# Altium PCB BearlyML Carrier Board.pcbdoc (part 1 of 2)
Units mil, origin at the board's own origin, x right, y up, seen from the top; angles counter-clockwise.
Board outline 9503.92 x 5409.44 mil, 6 copper layers (Top Layer, Mid-Layer 1, Mid-Layer 2, Mid-Layer 3, Mid-Layer 4, Bottom Layer); 88 components, 113 nets, 672 pads, 238 vias.
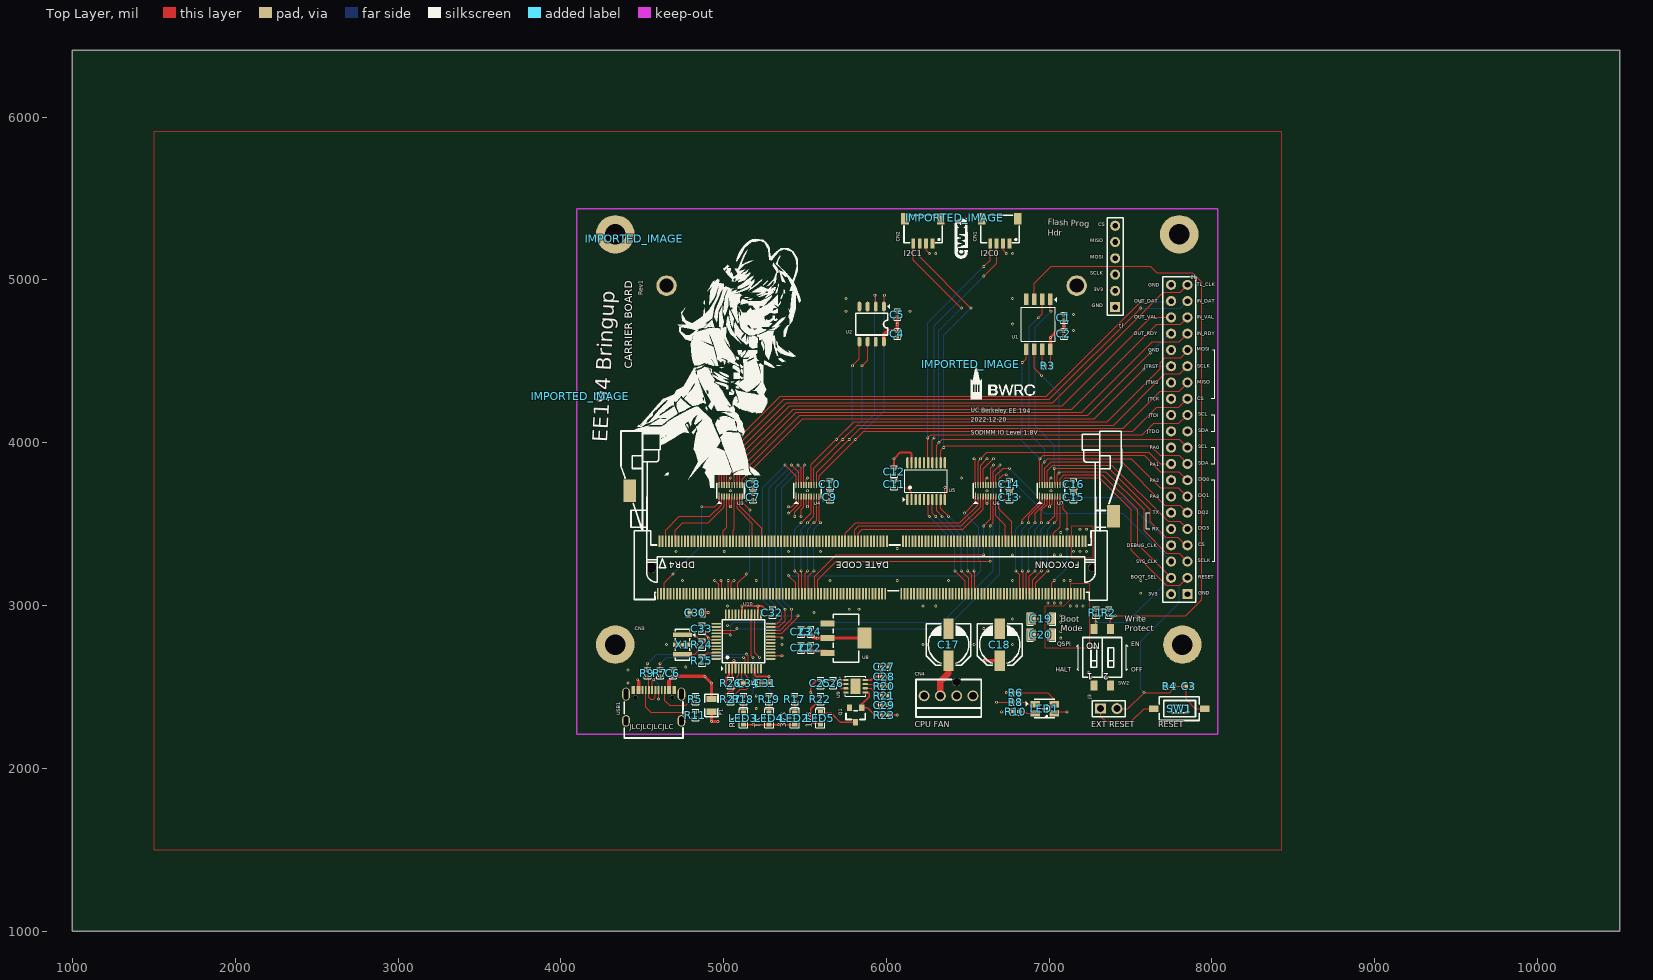
[diagram p0: Top Layer view]
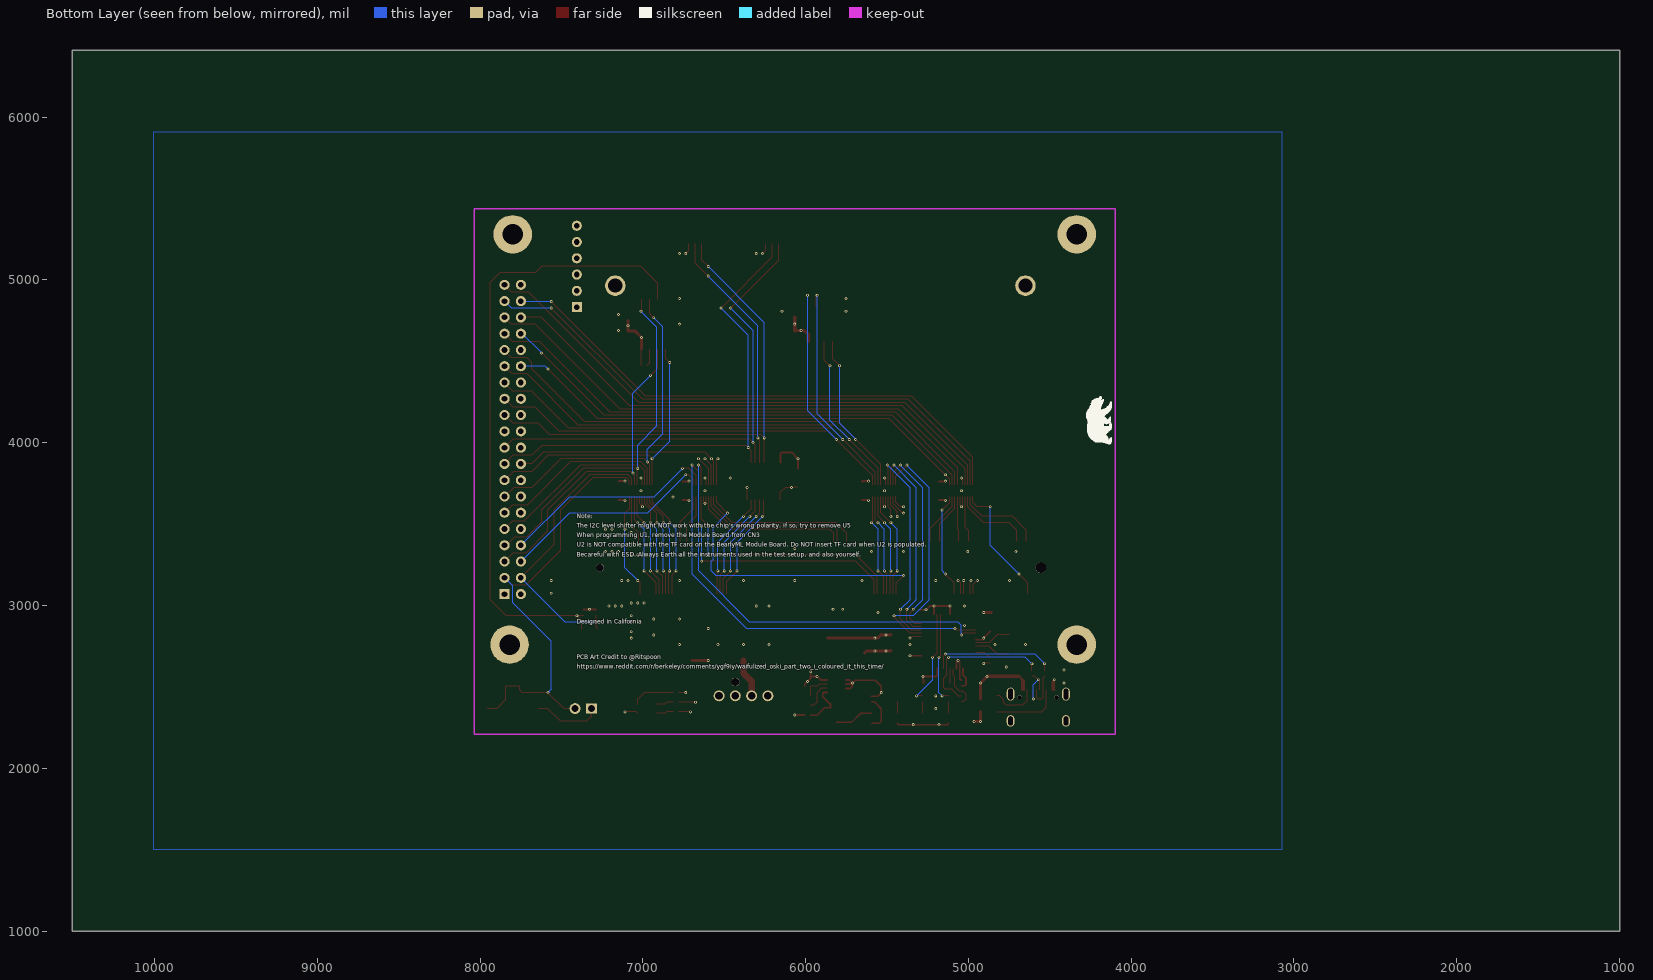
[diagram p1: Bottom Layer view, seen from below]
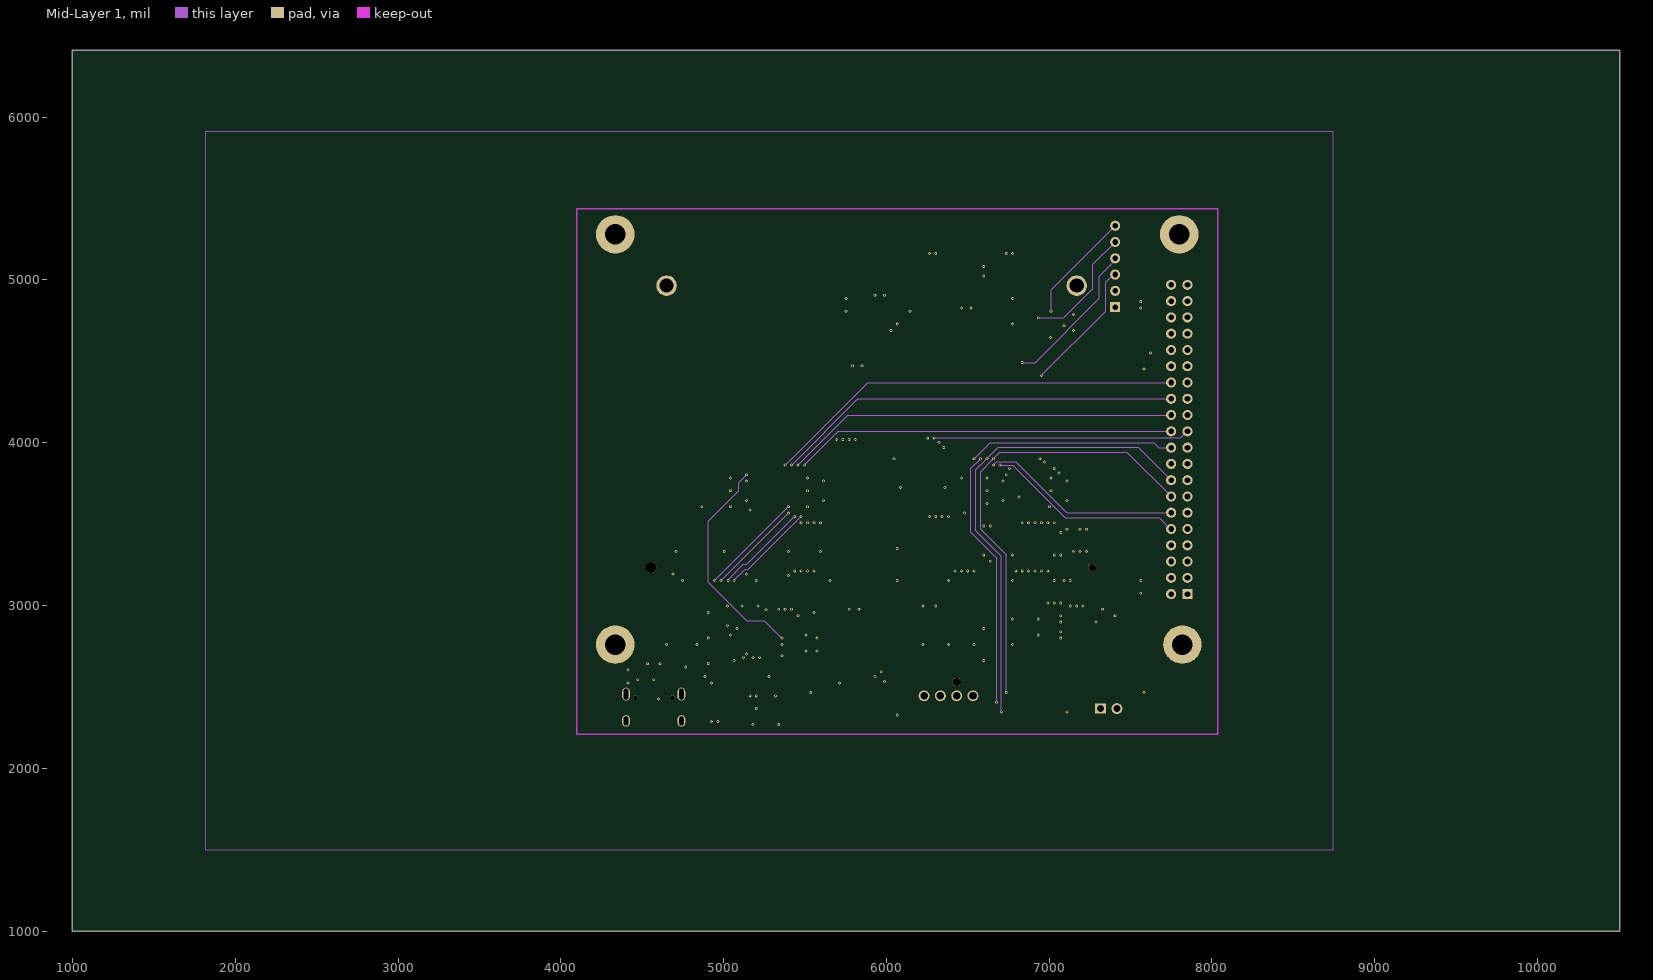
[diagram p2: Mid-Layer 1]
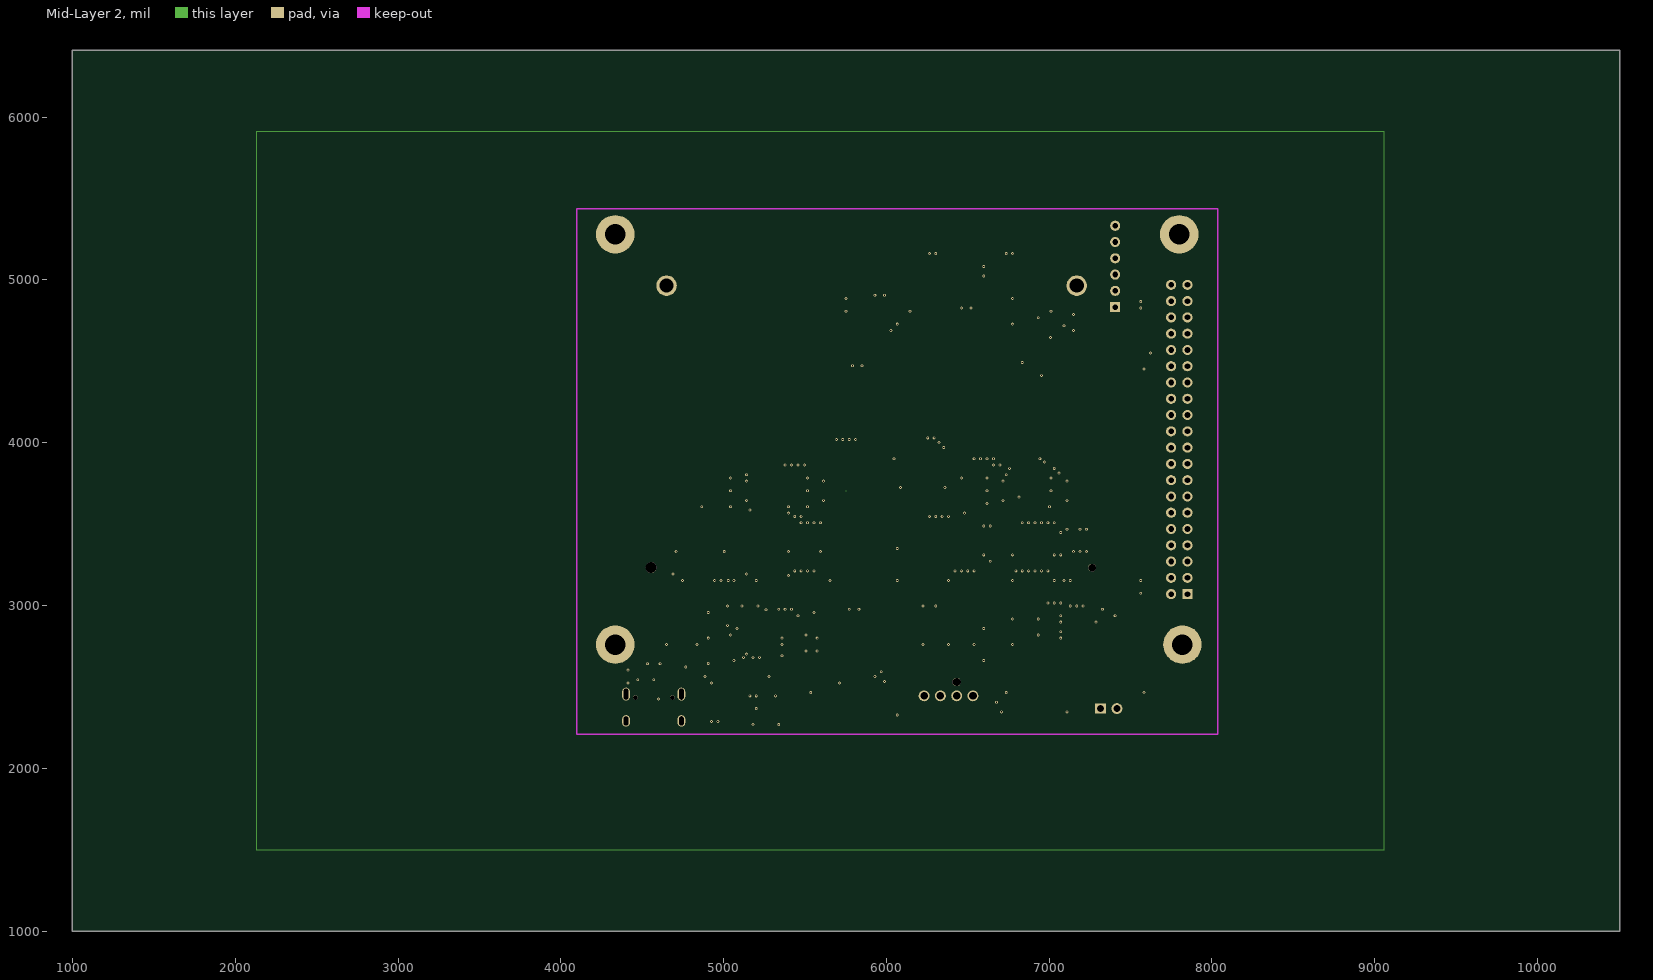
[diagram p3: Mid-Layer 2]
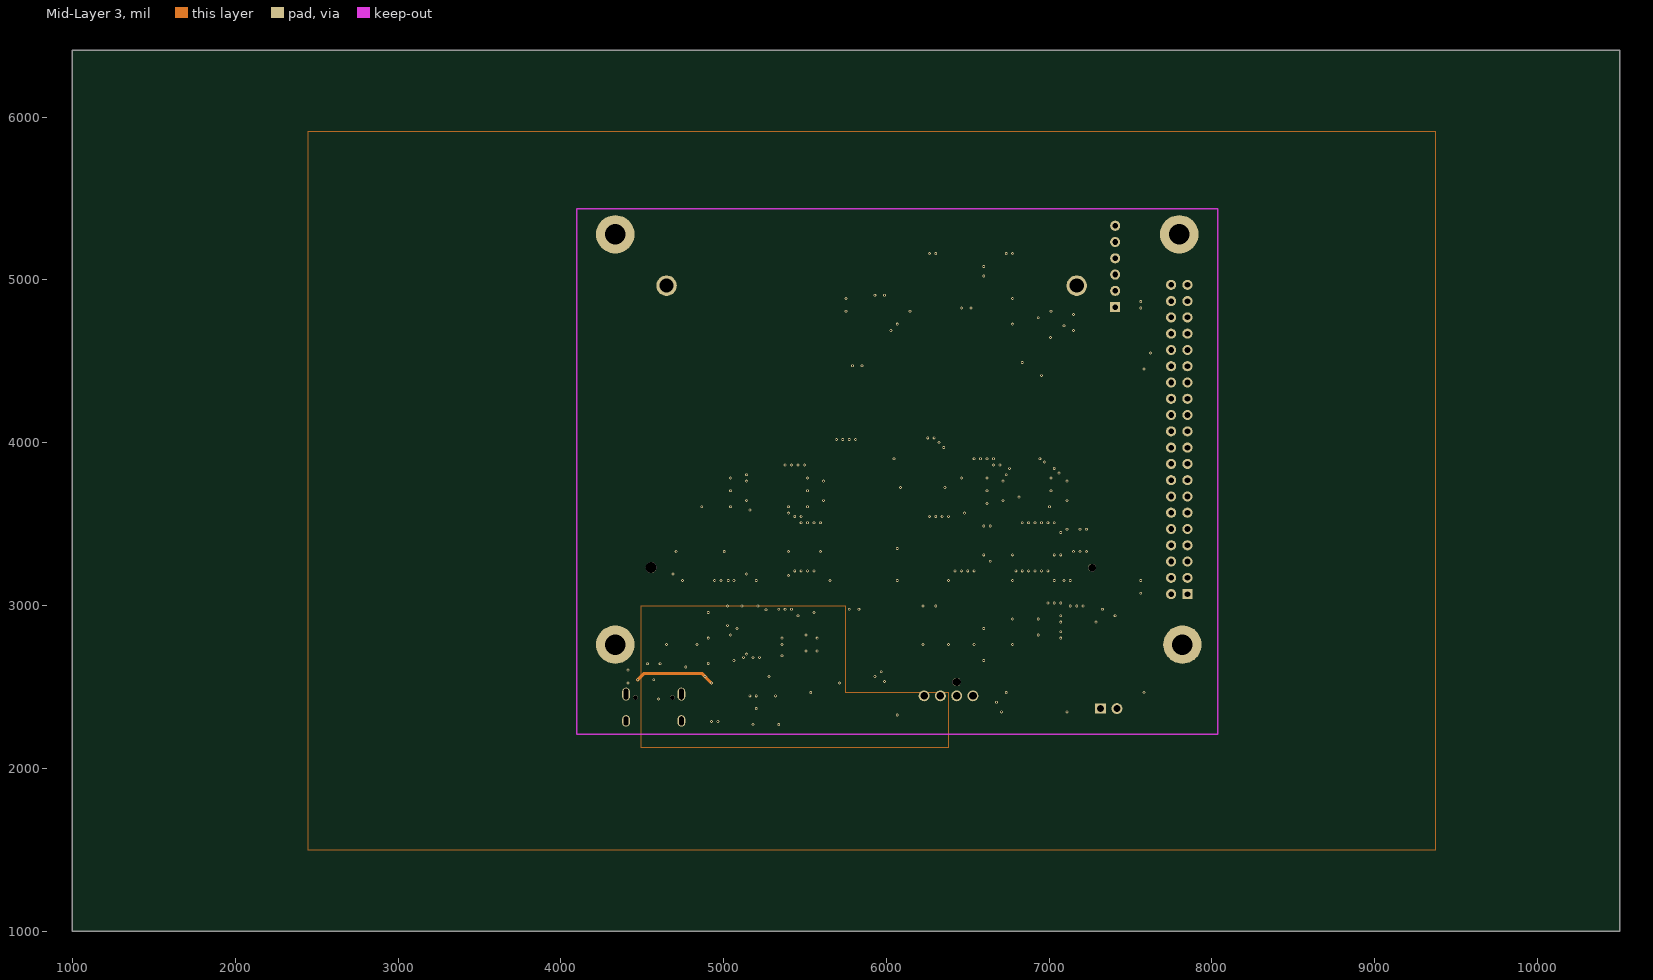
[diagram p4: Mid-Layer 3]
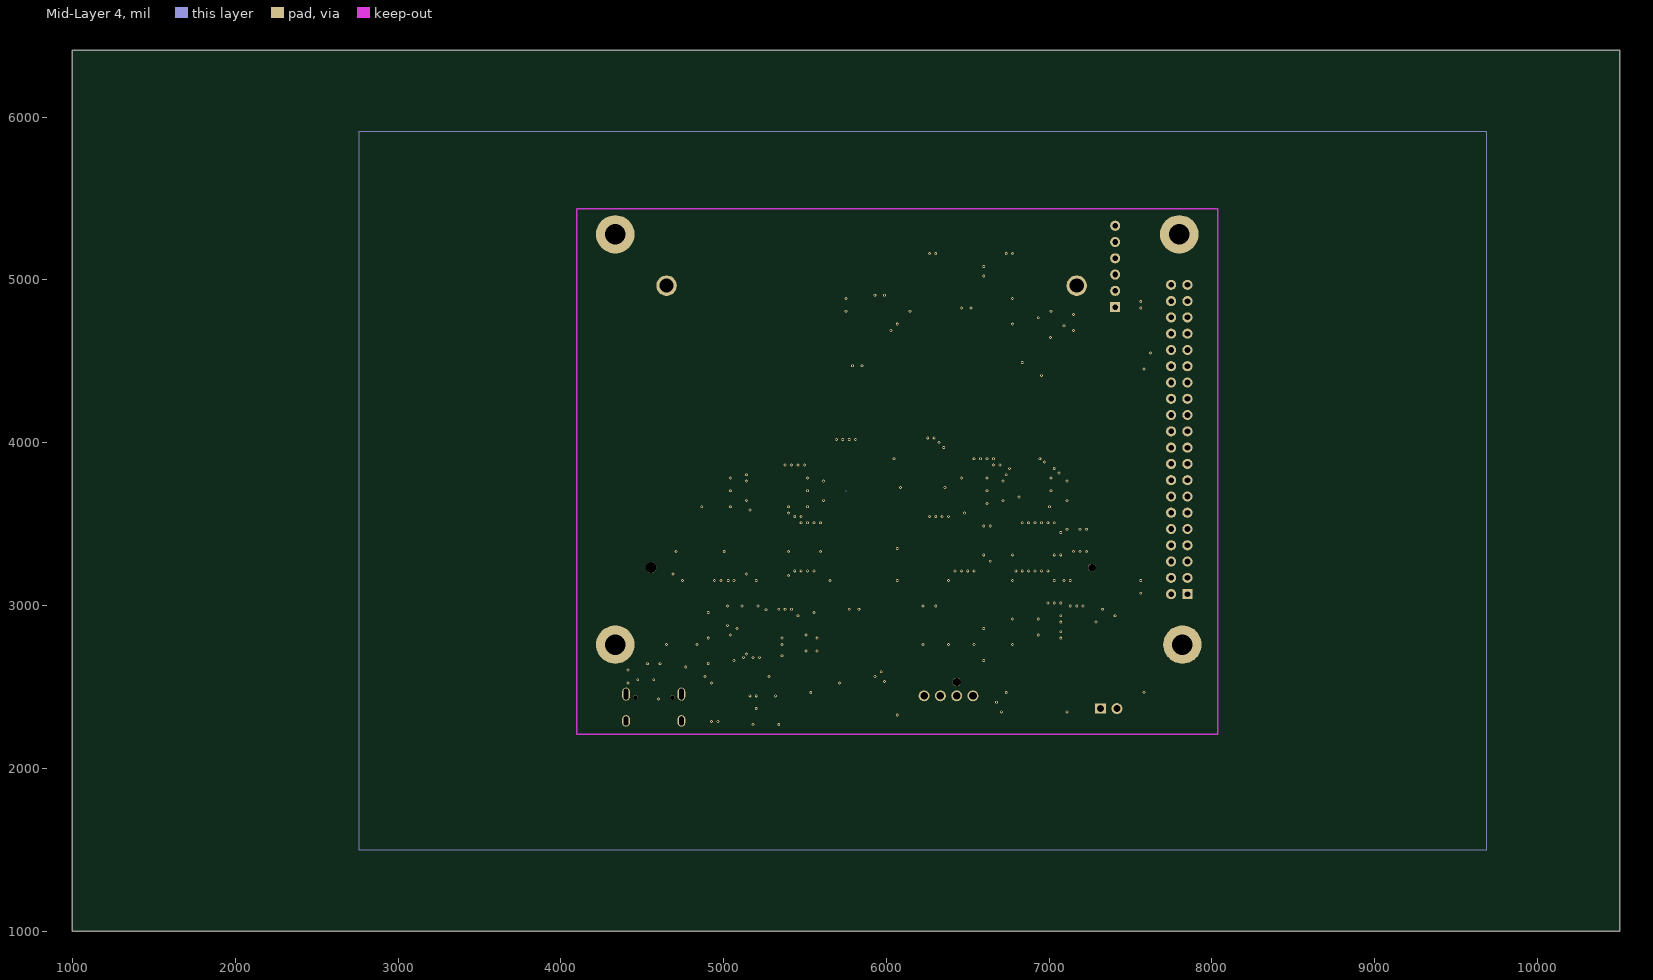
[diagram p5: Mid-Layer 4]

## Layer stack, top to bottom
Top Solder: solder mask 0.4, Solder Resist, Dk 3.5
Top Layer: signal copper 1.4
Dielectric1: dielectric 12.6, FR-4, Dk 4.8
Mid-Layer 1: signal copper 1.4
Dielectric3: dielectric 12.6, FR-4, Dk 4.8
Mid-Layer 2: signal copper 1.4
Dielectric5: dielectric 12.6, FR-4, Dk 4.8
Mid-Layer 3: signal copper 1.4
Dielectric2: dielectric 12.6, FR-4, Dk 4.8
Mid-Layer 4: signal copper 1.4
Dielectric4: dielectric 12.6, FR-4, Dk 4.8
Bottom Layer: signal copper 1.4
Bottom Solder: solder mask 0.4, Solder Resist, Dk 3.5

## Board outline
10503.92,1000 1000,1000 1000,6409.44 10503.92,6409.44

## Design rules (kind name [scope] priority, off if disabled: settings)
Clearance [All] p1: gap=10 ignorepadtopadclearanceinfootprint=FALSE except(0: Arc-Hole Track-Hole SMDPad-Hole THPad-Hole Via-Hole Fill-Hole Poly-Hole Region-Hole Text-Hole)
PolygonConnect [All] p1: connectstyle=Relief reliefconductorwidth=10 reliefentries=4 polygonreliefangle="90 Angle" airgapwidth=10
RoutingVias [All] p1: holewidth=28 width=50 viastyle="Through Hole" minholewidth=28 minwidth=50 maxholewidth=28 maxwidth=50
SolderMaskExpansion [All] p1: expansion=4 istentingtop=FALSE
Width [All] p1: maxlimit=10 minlimit=10 preferedwidth=10
30 further rules are at their usual default settings.

## Components (designator, comment, footprint, x,y, rotation, side; value= is the part's Value field where it differs from the comment)
C1 "100n" CAPA-0402 7090.46,4767.74 r270 top
C2 "1u" CAPA-0402 7090.46,4669.34 r90 top
C3 "100n" CAPA-0402 7858.24,2503.94 r180 top
C4 "100n" CAPA-0402 6066.94,4669.31 r90 top
C5 "1u" CAPA-0402 6066.94,4787.4 r270 top
C6 "10n" CAPA-0402 4688.94,2582.64 r270 top
C7 "100n" CAPA-0402 5181.14,3665.34 r270 top
C8 "100n" CAPA-0402 5181.14,3744.04 r90 top
C9 "100n" CAPA-0402 5653.54,3665.34 r270 top
C10 "100n" CAPA-0402 5653.54,3744.04 r90 top
C11 "100n" CAPA-0402 6047.24,3744.04 r270 top
C12 "100n" CAPA-0402 6047.24,3822.84 r90 top
C13 "100n" CAPA-0402 6755.94,3665.34 r270 top
C14 "100n" CAPA-0402 6755.94,3744.04 r90 top
C15 "100n" CAPA-0402 7149.64,3665.34 r270 top
C16 "100n" CAPA-0402 7149.64,3744.04 r90 top
C17 "220u" CAPPR5.0-D6.3_L6.6_W6.6 6381.84,2759.84 r270 top
C18 "220u" CAPPR5.0-D6.3_L6.6_W6.6 6696.84,2759.84 r270 top
C19 "22u" CAPA-1206 6952.74,2917.34 r0 top
C20 "22u" CAPA-1206 6952.74,2818.94 r0 top
C21 "100n" CAPA-0402 5476.34,2740.14 r270 top
C22 "10u" CAPA-0402 5535.44,2740.14 r270 top
C23 "10u" CAPA-0402 5476.34,2838.54 r270 top
C24 "100n" CAPA-0402 5535.44,2838.54 r270 top
C25 "10u" CAPA-0402 5594.44,2523.64 r90 top
C26 "100n" CAPA-0402 5673.24,2523.64 r90 top
C27 "100n" CAPA-0402 5988.14,2622.04 r180 top
C28 "10u" CAPA-0402 5988.14,2562.94 r180 top
C29 "1n" CAPA-0402 5988.14,2385.84 r180 top
C30 "10u" CAPA-0603 4826.74,2956.64 r0 top
C31 "100n" CAPA-0402 5259.84,2523.64 r0 top
C32 "100n" CAPA-0402 5299.24,2956.64 r90 top
C33 "100n" CAPA-0402 4866.14,2858.24 r270 top
C34 "33n" CAPA-0603 5151.54,2523.64 r180 top
CN1 "SM04B-SRSS-TB(LF)(SN)" CONN-SMD_4P-P1.00_SM04B-SRSS-TB-LF-SN 6696.83,5299.24 r180 top
CN2 "SM04B-SRSS-TB(LF)(SN)" CONN-SMD_4P-P1.00_SM04B-SRSS-TB-LF-SN 6224.43,5299.24 r180 top
CN3 "ASAA826-E8SB0-7H" CONN-SMD_ASAA826-E8SB0-7H 5909.44,3232.28 r180 top
CN4 "47053-1000" CONN-TH_47053-1000 6381.84,2444.84 r180 top
F1 "6V 2A" R0805 4925.19,2385.82 r270 top
IMPORTED_IMAGE "Comment" IMPORTED_IMAGE 4118.76,4284.69 r0 top
IMPORTED_IMAGE "Comment" IMPORTED_IMAGE 6519.68,4482.27 r0 top
IMPORTED_IMAGE "Comment" IMPORTED_IMAGE 4451.3,5254.03 r0 top
IMPORTED_IMAGE "Comment" IMPORTED_IMAGE 6420,5382.45 r0 top
J1 "HDR-M-2.54_1x6" HDR-M-2.54_1X6 7405.54,5082.64 r90 top
J2 "HDR-M-2.54_2x20" HDR-M-2.54_2X20 7799.24,4019.64 r90 top
J3 "HDR-M-2.54_1x2" HDR-M-2.54_1X2 7366.14,2366.14 r0 top
LED1 "LED-RGB" LED-ARRAY-SMD_4P-L3.2-W2.7-TL-RD_TJ-S3528 6972.44,2366.14 r0 top
LED2 "LED-0603_R" LED-0603 5437.04,2307.04 r90 top
LED3 "LED-0603_W" LED-0603 5122.04,2307.04 r90 top
LED4 "LED-0603_W" LED-0603 5279.54,2307.04 r90 top
LED5 "LED-0603_R" LED-0603 5594.48,2307.09 r90 top
Q1 "FDV301N" SOT-23_L2.9-W1.3-P1.90-LS2.4-BR 5811.02,2326.77 r90 top
R1 "2k" RES-0402 7287.39,2956.69 r90 top
R2 "10k" RES-0402 7366.14,2956.64 r90 top
R3 "10k" RES-0402 6992.06,4472.44 r0 top
R4 "2k" RES-0402 7740.15,2503.93 r0 top
R5 "5k1" RES-0402 4826.74,2425.24 r270 top
R6 "1k" RES-0402 6795.24,2464.54 r180 top
R7 "27R" RES-0402 4610.23,2582.68 r90 top
R8 "1k" RES-0402 6795.24,2405.54 r180 top
R9 "27R" RES-0402 4531.54,2582.64 r90 top
R10 "1k" RES-0402 6795.24,2346.44 r180 top
R11 "5k1" RES-0402 4826.74,2326.74 r270 top
R17 "1k" RES-0402 5437.04,2425.24 r270 top
R18 "1k" RES-0402 5122.04,2425.24 r270 top
R19 "1k" RES-0402 5279.54,2425.24 r270 top
R20 "160k" RES-0402 5988.14,2503.94 r0 top
R21 "47k" RES-0402 5988.14,2444.84 r180 top
R22 "1k" RES-0402 5594.44,2425.24 r90 top
R23 "10k" RES-0402 5988.14,2326.74 r0 top
R24 "1M" RES-0402 4866.14,2759.84 r270 top
R25 "470R" RES-0402 4866.14,2661.44 r90 top
R26 "10k" RES-0402 5043.34,2523.64 r270 top
R27 "1k5" RES-0402 5043.34,2425.24 r270 top
SW1 "TS-1007S-AR02516" SW-SMD_L6.1-W3.6-LS7.9 7799.2,2366.14 r180 top
SW2 "KF1027B-02P-L00-ON-01B" SW-SMD_4P-L6.1-W6.2-P2.54-LS10.0 7326.76,2681.1 r0 top
U1 "IS25LP032D-JBLA3" SOIC-8_L5.3-W5.3-P1.27-LS7.9-BL 6933.06,4728.34 r180 top
U2 "APS6404L-3SQR-SN" SOIC-8_L5.0-W4.0-P1.27-LS6.0-TL 5909.44,4728.35 r270 top
U3 "TXB0108DQSR" SON-20_L4.0-W2.0-P0.40-BL 5043.31,3704.68 r0 top
U4 "TXB0108DQSR" SON-20_L4.0-W2.0-P0.40-BL 5515.7,3704.68 r0 top
U5 "TXS0108EPWR" TSSOP-20_L6.5-W4.4-P0.65-LS6.4-BL 6244.04,3763.74 r0 top
U6 "TXB0108DQSR" SON-20_L4.0-W2.0-P0.40-BL 6618.1,3704.68 r0 top
U7 "TXB0108DQSR" SON-20_L4.0-W2.0-P0.40-BL 7011.81,3704.68 r0 top
U8 "AMS1117-3.3" SOT-223_L6.5_W3.5_P2.30_BL 5751.94,2799.24 r270 top
U9 "MCP1726-ADJE/MF" TDFN-8_L3.0-W3.0-P0.65-BL-EP 5810.94,2503.96 r270 top
U10 "FT2232D" LQFP-48_L7.0-W7.0-P0.50-LS9.0-BL 5122.04,2779.54 r0 top
USB1 "USB-TYPEC" USB-C-SMD_KH-TYPE-C-16P 4570.86,2385.82 r0 top
X1 "6MHz" CRYSTAL-SMD_3P-L4.5-W2.0-L 4748.05,2759.84 r270 top

## Footprints (in the part's own frame and the unit in brackets; to place one, negate y for a bottom-side part, rotate by r counter-clockwise, add the part's x,y. Pads: shape width x height; smd on the part's side, far side on the other; paste and mask are expansions set on the pad)
CAPA-0402 [mm]
  rect 0.566x0.54 smd paste-100 mask+0.051: 1(-0.433,0) 2(0.433,0)
  silkscreen extent -0.87,-0.5 0.87,0.5
CAPA-0603 [mm]
  rect 0.9x0.8 smd paste+0 mask+0.051: 1(-0.8,0) 2(0.8,0)
  silkscreen extent -1.5,-0.62 1.5,0.62
CAPA-1206 [mil]
  rect 47.54x66.97 smd paste-3937.01 mask+2: 1(-58.22,0) 2(58.22,0)
  silkscreen extent -89,-39 89,39
CAPPR5.0-D6.3_L6.6_W6.6 [mm]
  rect 3.2x1.6 smd paste+0 mask+0.102: 1(2.5,0) 2(-2.5,0)
  silkscreen extent -3.25,-3.5 3.25,3.5
CONN-SMD_4P-P1.00_SM04B-SRSS-TB-LF-SN [mm]
  rect 0.6x1.55 smd paste+0 mask+0.051: 1(-1.5,1.938) 2(-0.5,1.938) 3(0.501,1.938) 4(1.5,1.938)
  rect 1.2x1.8 smd paste+0 mask+0.051: 5(2.8,-1.938) 6(-2.8,-1.938)
  silkscreen extent -3.02,-2.46 2.96,1.8
CONN-SMD_ASAA826-E8SB0-7H [mm]
  rect 0.3x1.8 smd paste+0 mask+0.051: 1(33.375,4.1) 2(33.125,-4.1) 3(32.875,4.1) 4(32.625,-4.1) 5(32.375,4.1) 6(32.125,-4.1) 7(31.875,4.1) 8(31.625,-4.1) 9(31.375,4.1) 10(31.125,-4.1) 11(30.875,4.1) 12(30.625,-4.1) 13(30.375,4.1) 14(30.125,-4.1) 15(29.875,4.1) 16(29.625,-4.1) 17(29.375,4.1) 18(29.125,-4.1) 19(28.875,4.1) 20(28.625,-4.1) 21(28.375,4.1) 22(28.125,-4.1) 23(27.875,4.1) 24(27.625,-4.1) 25(27.375,4.1) 26(27.125,-4.1) 27(26.875,4.1) 28(26.625,-4.1) 29(26.375,4.1) 30(26.125,-4.1) 31(25.875,4.1) 32(25.625,-4.1) 33(25.375,4.1) 34(25.125,-4.1) 35(24.875,4.1) 36(24.625,-4.1) 37(24.375,4.1) 38(24.125,-4.1) 39(23.875,4.1) 40(23.625,-4.1) 41(23.375,4.1) 42(23.125,-4.1) 43(22.875,4.1) 44(22.625,-4.1) 45(22.375,4.1) 46(22.125,-4.1) 47(21.875,4.1) 48(21.625,-4.1) 49(21.375,4.1) 50(21.125,-4.1) 51(20.875,4.1) 52(20.625,-4.1) 53(20.375,4.1) 54(20.125,-4.1) 55(19.875,4.1) 56(19.625,-4.1) 57(19.375,4.1) 58(19.125,-4.1) 59(18.875,4.1) 60(18.625,-4.1) 61(18.375,4.1) 62(18.125,-4.1) 63(17.875,4.1) 64(17.625,-4.1) 65(17.375,4.1) 66(17.125,-4.1) 67(16.875,4.1) 68(16.625,-4.1) 69(16.375,4.1) 70(16.125,-4.1) 71(15.875,4.1) 72(15.625,-4.1) 73(15.375,4.1) 74(15.125,-4.1) 75(14.875,4.1) 76(14.625,-4.1) 77(14.375,4.1) 78(14.125,-4.1) 79(13.875,4.1) 80(13.625,-4.1) 81(13.375,4.1) 82(13.125,-4.1) 83(12.875,4.1) 84(12.625,-4.1) 85(12.375,4.1) 86(12.125,-4.1) 87(11.875,4.1) 88(11.625,-4.1) 89(11.375,4.1) 90(11.125,-4.1) 91(10.875,4.1) 92(10.625,-4.1) 93(10.375,4.1) 94(10.125,-4.1) 95(9.875,4.1) 96(9.625,-4.1) 97(9.375,4.1) 98(9.125,-4.1) 99(8.875,4.1) 100(8.625,-4.1) 101(8.375,4.1) 102(8.125,-4.1) 103(7.875,4.1) 104(7.625,-4.1) 105(7.375,4.1) 106(7.125,-4.1) 107(6.875,4.1) 108(6.625,-4.1) 109(6.375,4.1) 110(6.125,-4.1) 111(5.875,4.1) 112(5.625,-4.1) 113(5.375,4.1) 114(5.125,-4.1) 115(4.875,4.1) 116(4.625,-4.1) 117(4.375,4.1) 118(4.125,-4.1) 119(3.875,4.1) 120(3.625,-4.1) 121(3.375,4.1) 122(3.125,-4.1) 123(2.875,4.1) 124(2.625,-4.1) 125(2.375,4.1) 126(2.125,-4.1) 127(1.875,4.1) 128(1.625,-4.1) 129(1.375,4.1) 130(1.125,-4.1) 131(0.875,4.1) 132(0.625,-4.1) 133(0.375,4.1) 134(0.125,-4.1) 135(-0.125,4.1) 136(-0.375,-4.1) 137(-0.625,4.1) 138(-0.875,-4.1) 139(-1.125,4.1) 140(-1.375,-4.1) 141(-1.625,4.1) 142(-1.875,-4.1) 143(-2.125,4.1) 144(-2.375,-4.1) 145(-4.625,4.1) 146(-4.875,-4.1) 147(-5.125,4.1) 148(-5.375,-4.1) 149(-5.625,4.1) 150(-5.875,-4.1) 151(-6.125,4.1) 152(-6.375,-4.1) 153(-6.625,4.1) 154(-6.875,-4.1) 155(-7.125,4.1) 156(-7.375,-4.1) 157(-7.625,4.1) 158(-7.875,-4.1) 159(-8.125,4.1) 160(-8.375,-4.1) 161(-8.625,4.1) 162(-8.875,-4.1) 163(-9.125,4.1) 164(-9.375,-4.1) 165(-9.625,4.1) 166(-9.875,-4.1) 167(-10.125,4.1) 168(-10.375,-4.1) 169(-10.625,4.1) 170(-10.875,-4.1) 171(-11.125,4.1) 172(-11.375,-4.1) 173(-11.625,4.1) 174(-11.875,-4.1) 175(-12.125,4.1) 176(-12.375,-4.1) 177(-12.625,4.1) 178(-12.875,-4.1) 179(-13.125,4.1) 180(-13.375,-4.1) 181(-13.625,4.1) 182(-13.875,-4.1) 183(-14.125,4.1) 184(-14.375,-4.1) 185(-14.625,4.1) 186(-14.875,-4.1) 187(-15.125,4.1) 188(-15.375,-4.1) 189(-15.625,4.1) 190(-15.875,-4.1) 191(-16.125,4.1) 192(-16.375,-4.1) 193(-16.625,4.1) 194(-16.875,-4.1) 195(-17.125,4.1) 196(-17.375,-4.1) 197(-17.625,4.1) 198(-17.875,-4.1) 199(-18.125,4.1) 200(-18.375,-4.1) 201(-18.625,4.1) 202(-18.875,-4.1) 203(-19.125,4.1) 204(-19.375,-4.1) 205(-19.625,4.1) 206(-19.875,-4.1) 207(-20.125,4.1) 208(-20.375,-4.1) 209(-20.625,4.1) 210(-20.875,-4.1) 211(-21.125,4.1) 212(-21.375,-4.1) 213(-21.625,4.1) 214(-21.875,-4.1) 215(-22.125,4.1) 216(-22.375,-4.1) 217(-22.625,4.1) 218(-22.875,-4.1) 219(-23.125,4.1) 220(-23.375,-4.1) 221(-23.625,4.1) 222(-23.875,-4.1) 223(-24.125,4.1) 224(-24.375,-4.1) 225(-24.625,4.1) 226(-24.875,-4.1) 227(-25.125,4.1) 228(-25.375,-4.1) 229(-25.625,4.1) 230(-25.875,-4.1) 231(-26.125,4.1) 232(-26.375,-4.1) 233(-26.625,4.1) 234(-26.875,-4.1) 235(-27.125,4.1) 236(-27.375,-4.1) 237(-27.625,4.1) 238(-27.875,-4.1) 239(-28.125,4.1) 240(-28.375,-4.1) 241(-28.625,4.1) 242(-28.875,-4.1) 243(-29.125,4.1) 244(-29.375,-4.1) 245(-29.625,4.1) 246(-29.875,-4.1) 247(-30.125,4.1) 248(-30.375,-4.1) 249(-30.625,4.1) 250(-30.875,-4.1) 251(-31.125,4.1) 252(-31.375,-4.1) 253(-31.625,4.1) 254(-31.875,-4.1) 255(-32.125,4.1) 256(-32.375,-4.1) 257(-32.625,4.1) 258(-32.875,-4.1) 259(-33.125,4.1) 260(-33.375,-4.1)
  rect 2x3.5 smd paste+0 mask+0.051: 261(37.75,-12) 262(-37.75,-8)
  round 1.2 hole 1.2 unplated paste+0: ""(-34.4,0)
  round 1.7 hole 1.7 unplated paste+0: ""(34.4,0)
  silkscreen extent -38.98,-21.33 39.11,5.1
CONN-TH_47053-1000 [mm]
  round 1.7 hole 1.2 paste+0 mask+0.051: 1(3.81,0) 2(1.27,0) 3(-1.27,0) 4(-3.81,0)
  round 1.3 hole 1.3 unplated paste+0: ""(-1.27,-2.16)
  silkscreen extent -5.08,-2.54 5.08,3.3
CRYSTAL-SMD_3P-L4.5-W2.0-L [mm]
  rect 0.7x3 smd paste+0 mask+0.05: 1(-1.5,0) 2(0,0) 3(1.5,0)
  silkscreen extent -2.41,-1.14 2.41,2
HDR-M-2.54_1X2 [mm]
  rect 1.7x1.575 hole 1.1 paste+0 mask+0.051: 1(-1.27,0)
  round 1.7 hole 1.1 paste+0 mask+0.051: 2(1.27,0)
  silkscreen extent -2.54,-1.27 2.54,1.27
HDR-M-2.54_1X6 [mil]
  rect 62x62 hole 35 paste+0 mask+2: 1(-250,0)
  round 62 hole 35 paste+0 mask+2: 2(-150,0) 3(-50,0) 4(50,0) 5(150,0) 6(250,0)
  silkscreen extent -300,-50 300,50
HDR-M-2.54_2X20 [mil]
  rect 62x62 hole 35 paste+0 mask+2: 1(-950,-50)
  round 62 hole 35 paste+0 mask+2: 2(-950,50) 3(-850,-50) 4(-850,50) 5(-750,-50) 6(-750,50) 7(-650,-50) 8(-650,50) 9(-550,-50) 10(-550,50) 11(-450,-50) 12(-450,50) 13(-350,-50) 14(-350,50) 15(-250,-50) 16(-250,50) 17(-150,-50) 18(-150,50) 19(-50,-50) 20(-50,50) 21(50,-50) 22(50,50) 23(150,-50) 24(150,50) 25(250,-50) 26(250,50) 27(350,-50) 28(350,50) 29(450,-50) 30(450,50) 31(550,-50) 32(550,50) 33(650,-50) 34(650,50) 35(750,-50) 36(750,50) 37(850,-50) 38(850,50) 39(950,-50) 40(950,50)
  silkscreen extent -1000,-100 1000,100
IMPORTED_IMAGE [mil]
LED-0603 [mm]
  rect 0.9x0.8 smd paste+0 mask+0.102: 1(-0.8,0) 2(0.8,0)
  silkscreen extent -1.51,-0.69 1.7,0.69
LED-ARRAY-SMD_4P-L3.2-W2.7-TL-RD_TJ-S3528 [mm]
  rect 1.5x1 smd paste+0 mask+0.051: 1(-1.5,0.7) 2(-1.5,-0.7) 3(1.5,0.7) 4(1.5,-0.7)
  silkscreen extent -2.94,-1.44 1.61,1.44
LQFP-48_L7.0-W7.0-P0.50-LS9.0-BL [mm]
  oval 0.27x1.5 smd paste+0 mask+0.05: 1(-2.75,-4.25) 2(-2.25,-4.25) 3(-1.75,-4.25) 4(-1.25,-4.25) 5(-0.75,-4.25) 6(-0.25,-4.25) 7(0.25,-4.25) 8(0.75,-4.25) 9(1.25,-4.25) 10(1.75,-4.25) 11(2.25,-4.25) 12(2.75,-4.25) 25(2.75,4.25) 26(2.25,4.25) 27(1.75,4.25) 28(1.25,4.25) 29(0.75,4.25) 30(0.25,4.25) 31(-0.25,4.25) 32(-0.75,4.25) 33(-1.25,4.25) 34(-1.75,4.25) 35(-2.25,4.25) 36(-2.75,4.25)
  oval 1.5x0.27 smd paste+0 mask+0.05: 13(4.25,-2.75) 14(4.25,-2.25) 15(4.25,-1.75) 16(4.25,-1.25) 17(4.25,-0.75) 18(4.25,-0.25) 19(4.25,0.25) 20(4.25,0.75) 21(4.25,1.25) 22(4.25,1.75) 23(4.25,2.25) 24(4.25,2.75) 37(-4.25,2.75) 38(-4.25,2.25) 39(-4.25,1.75) 40(-4.25,1.25) 41(-4.25,0.75) 42(-4.25,0.25) 43(-4.25,-0.25) 44(-4.25,-0.75) 45(-4.25,-1.25) 46(-4.25,-1.75) 47(-4.25,-2.25) 48(-4.25,-2.75)
  silkscreen extent -3.5,-4.62 3.3,3.34
R0805 [mm]
  rect 1x1.55 smd paste+0 mask+0.102: 1(-1,0) 2(1,0)
  silkscreen extent -1.75,-1.02 1.75,1.02
RES-0402 [mm]
  rect 0.566x0.54 smd paste-100 mask+0.051: 1(-0.433,0) 2(0.433,0)
  silkscreen extent -0.87,-0.5 0.87,0.5
SOIC-8_L5.0-W4.0-P1.27-LS6.0-TL [mm]
  oval 1.52x0.6 smd paste+0 mask+0.051: 1(-2.74,1.905) 2(-2.74,0.635) 3(-2.74,-0.635) 4(-2.74,-1.905) 5(2.74,-1.905) 6(2.74,-0.635) 7(2.74,0.635) 8(2.74,1.905)
  silkscreen extent -3.12,-2.5 1.7,2.81
SOIC-8_L5.3-W5.3-P1.27-LS7.9-BL [mm]
  rect 0.7x1.8 smd paste+0 mask+0.05: 1(-1.905,-3.9) 2(-0.635,-3.9) 3(0.635,-3.9) 4(1.905,-3.9) 5(1.905,3.9) 6(0.635,3.9) 7(-0.635,3.9) 8(-1.905,3.9)
  silkscreen extent -2.85,-4.18 2.65,2.65
SON-20_L4.0-W2.0-P0.40-BL [mm]
  rect 0.2x1.1 smd paste+0 mask+0.051: 1(-1.8,-0.85)
  rect 0.2x1 smd paste+0 mask+0.051: 2(-1.4,-0.9) 3(-1,-0.9) 4(-0.6,-0.9) 5(-0.2,-0.9) 6(0.2,-0.9) 7(0.6,-0.9) 8(1,-0.9) 9(1.4,-0.9) 10(1.8,-0.9) 11(1.8,0.9) 12(1.4,0.9) 13(1,0.9) 14(0.6,0.9) 15(0.2,0.9) 16(-0.2,0.9) 17(-0.6,0.9) 18(-1,0.9) 19(-1.4,0.9) 20(-1.8,0.9)
  silkscreen extent -2.16,-2 2.16,1.14
SOT-23_L2.9-W1.3-P1.90-LS2.4-BR [mm]
  rect 1x0.8 smd paste+0 mask+0.051: 1(1.15,-0.95) 2(1.15,0.95) 3(-1.15,0)
  silkscreen extent -0.7,-1.5 0.7,1.5
SOT-223_L6.5_W3.5_P2.30_BL [mm]
  rect 0.95x2.15 smd paste+0 mask+0.102: 1(-2.3,-2.9) 2(0,-2.9) 3(2.3,-2.9)
  rect 3.25x2.2 smd paste+0 mask+0.102: 2(0,2.9)
  silkscreen extent -3.75,-2 3.75,2
SW-SMD_4P-L6.1-W6.2-P2.54-LS10.0 [mil]
  rect 43.31x60 smd paste+0 mask+2: 1(-50.01,-173.59) 2(49.99,-173.59) 3(49.99,173.58) 4(-50.01,173.58)
  silkscreen extent -120,-123 120,122
SW-SMD_L6.1-W3.6-LS7.9 [mm]
  rect 1.5x1 smd paste+0 mask+0.051: 1(-3.95,0) 2(3.95,0)
  silkscreen extent -3.1,-1.85 3.1,1.85
TDFN-8_L3.0-W3.0-P0.65-BL-EP [mm]
  oval 0.35x0.84 smd paste+0 mask+0.051: 1(-0.975,-1.495) 2(-0.325,-1.495) 3(0.325,-1.495) 4(0.975,-1.495) 5(0.975,1.495) 6(0.325,1.495) 7(-0.325,1.495) 8(-0.975,1.495)
  rect 2.4x1.6 smd paste+0 mask+0.051: 9(0,0)
  silkscreen extent -1.58,-2.5 1.58,1.58
TSSOP-20_L6.5-W4.4-P0.65-LS6.4-BL [mm]
  oval 0.364x1.742 smd paste+0 mask+0.051: 1(-2.925,-2.871) 2(-2.275,-2.871) 3(-1.625,-2.871) 4(-0.975,-2.871) 5(-0.325,-2.871) 6(0.325,-2.871) 7(0.975,-2.871) 8(1.625,-2.871) 9(2.275,-2.871) 10(2.925,-2.871) 11(2.925,2.871) 12(2.275,2.871) 13(1.625,2.871) 14(0.975,2.871) 15(0.325,2.871) 16(-0.325,2.871) 17(-0.975,2.871) 18(-1.625,2.871) 19(-2.275,2.871) 20(-2.925,2.871)
  silkscreen extent -3.63,-3.25 3.33,1.77
USB-C-SMD_KH-TYPE-C-16P [mm]
  oval 1.2x2 hole 0.7 slot 1.7 at 90 deg paste+0 mask+0.051: 1(-4.32,1.765) 2(4.32,1.765)
  oval 1.2x1.8 hole 0.7 slot 1.4 at 90 deg paste+0 mask+0.051: 3(-4.32,-2.415) 4(4.32,-2.415)
  rect 0.3x1.3 smd paste-100 mask+0.05: A1(-3.35,2.415) A4(-2.55,2.415) A5(-1.25,2.415) A6(-0.25,2.415) A7(0.25,2.415) A8(1.25,2.415) A9(2.55,2.415) A12(3.35,2.415) B1(3.05,2.415) B4(2.25,2.415) B5(1.75,2.415) B6(0.75,2.415) B7(-0.75,2.415) B8(-1.75,2.415) B9(-2.25,2.415) B12(-3.05,2.415)
  round 0.7 hole 0.7 unplated paste+0: ""(-2.89,1.235) ""(2.89,1.235)
  silkscreen extent -4.57,-5.08 4.57,0.57

## Free pads (board coordinates)
  round 236.22 hole 125.98 paste+0 mask+2: 1(4334.64,2759.84) 1(4334.64,5279.52) 2(7799.2,5279.52) 2(7818.89,2759.84)
  round 125.98 hole 86.61 paste+0 mask+2: 1(4649.6,4964.56) 1(7169.28,4964.56)

## Via types
v1: diameter 17.72, hole 7.87, Top Layer to Bottom Layer, 238 vias

## Nets (pads, with @x,y where several pads share a name; then routed paths per layer and width w, separated by ;. In a path a pad name is that pad's centre, name@x,y a point inside that pad or via, vN(x,y) a via of type N, cw(c..) or ccw(c..) an arc to the next point about the centre after c; other vN are vias at no path point)
1V8: C7.2 C9.2 C11.2 C13.2 C15.2 C19.2 C20.2 C27.2 C28.2 CN3.251 CN3.253 CN3.255 CN3.257 CN3.259 R20.2 U3.5 U3.6 U4.5 U4.6 U5.2 U5.10 U6.5 U6.6 U7.5 U7.6 U9.8 | length 1137.4
  Top Layer w5.91: U3.5@5035.42,3669.28 5035.42,3614.17 v1(5043.3,3606.29) 5051.18,3614.18 U3.6@5051.18,3669.24 ; U4.5@5507.87,3669.29 5507.87,3614.16 v1(5515.74,3606.29) 5523.58,3614.14 U4.6@5523.58,3669.24 ; C11.2@6047.24,3727 6083.92,3727.05 v1(6086.59,3724.38) ; v1@6086.54,3724.34 6125.94,3724.44 6154.52,3695.86 U5.2@6154.47,3650.71 ; U5.10@6359.2,3650.71 v1(6359.2,3724.4) ; U6.5@6610.23,3669.28 6610.23,3633.85 v1(6618.1,3625.98) 6625.98,3633.86 U6.6@6625.98,3669.24 ; U7.5@7003.93,3669.24 7003.94,3608.27 v1(7001.96,3606.29) 7019.68,3624.01 U7.6@7019.68,3669.24
  Top Layer w11.81: v1(5141.71,3645.64) 5144.38,3648.31 C7.2@5181.14,3648.3 ; v1(5614.15,3645.64) 5616.82,3648.31 C9.2@5653.54,3648.3 ; U9.8@5869.8,2542.35 5908.49,2542.35 v1(5929.13,2562.99) ; v1(5929.13,2562.99) C28.2@5971.14,2562.99 ; C27.2@5971.1,2622.04 5968.5,2619.4 v1(5968.5,2592.52) 5968.5,2565.63 C28.2@5971.14,2562.99 ; R20.2@6005.18,2503.94 6005.22,2516.42 v1(5988.18,2533.46) 5971.14,2550.5 C28.2@5971.14,2562.99 ; v1(6716.52,3645.66) 6719.17,3648.31 C13.2@6755.94,3648.3 ; v1(7110.21,3645.64) 7112.88,3648.31 C15.2@7149.64,3648.3
  other v1: 7070.85,2799.21 7070.85,2838.58 7070.85,2897.63 7070.85,2937 7129.91,2996.06 7169.28,2996.06 7208.65,2996.06
3V3: C1.2 C2.2 C4.2 C5.2 C8.2 C10.2 C12.2 C14.2 C16.2 C18.1 C23.2 C24.2 C25.2 C26.2 C30.2 C31.2 C32.2 CN1.2 CN2.2 CN3.252 CN3.254 CN3.256 CN3.258 CN3.260 J1.2 J2.2 J3.1 LED1.4 LED2.1 LED3.1 LED4.1 R1.2 R2.2 R3.2 R22.2 R23.2 SW1.2 U1.8 U2.8 U3.16 U4.16 U5.19 U6.16 U7.16 U8.2 U9.1 U9.2 U9.3 U10.10 U10.14 U10.26 U10.31 | length 3800.5
  Top Layer w5.91: U3.16@5035.43,3740.15 5035.43,3775.59 v1(5043.3,3783.46) ; U4.16@5507.87,3740.16 5507.87,3775.59 v1(5515.74,3783.46) ; CN2.2@6244.1,5222.94 6244.08,5181.1 v1(6263.77,5161.41) ; U6.16@6610.23,3740.15 6610.23,3775.59 v1(6618.1,3783.46) ; CN1.2@6716.51,5222.94 6716.52,5181.1 v1(6736.21,5161.41) ; U7.16@7003.93,3740.15 7003.93,3775.59 v1(7011.8,3783.46) ; U1.8@7008.02,4574.84 7009.12,4573.74 R3.2@7009.12,4472.47 ; LED1.4@7031.5,2338.58 7039.35,2346.45 v1(7110.22,2346.45) ; J3.1@7316.14,2366.14 7316.14,2317.71 7346.44,2287.4 7503.93,2287.4 7582.66,2366.14 SW1.2@7643.69,2366.14
  Top Layer w9.84: LED3.1@5122.04,2275.59 5129.92,2267.71 v1(5181.1,2267.71) v1(5338.58,2267.71) 5429.13,2267.71 LED2.1@5437,2275.59 ; R23.2@6005.22,2326.77 v1(6066.92,2326.77)
  Top Layer w11.81: U10.31@5112.21,2946.85 v1(5112.21,2996.06) v1(5210.63,2996.06) ; v1(5141.71,3763.75) 5144.33,3761.13 C8.2@5181.14,3761.08 ; U10.10@5190.94,2612.22 5190.94,2572.83 5200.78,2562.99 v1(5279.52,2562.99) 5279.52,2548.59 5276.88,2545.95 C31.2@5276.88,2523.64 ; U10.26@5210.63,2946.85 v1(5210.63,2996.06) ; U10.14@5289.36,2690.96 v1(5358.26,2690.95) ; C32.2@5299.24,2973.68 v1(5259.84,2973.73) 5237.51,2996.06 v1(5210.63,2996.06) ; R22.2@5594.48,2442.24 5557.76,2442.24 v1(5535.43,2464.56) 5535.43,2503.93 5572.15,2540.66 5594.48,2540.66 C26.2@5673.24,2540.68 ; v1(5614.15,3763.75) 5650.91,3763.75 C10.2@5653.54,3761.08 ; C26.2@5673.24,2540.64 5695.54,2540.64 5712.54,2523.64 5712.54,2503.96 5725.34,2491.16 U9.3@5752.04,2491.16 ; U9.2@5752.08,2516.76 5719.46,2516.75 v1(5712.59,2523.62) 5731.32,2542.35 U9.1@5752.08,2542.35 ; C12.2@6047.24,3839.88 v1(6047.24,3901.57) 6086.61,3940.94 6145.66,3940.94 6154.52,3932.08 U5.19@6154.47,3876.77 ; v1(6716.52,3763.77) 6719.16,3761.13 C14.2@6755.94,3761.08 ; v1(7110.21,3763.75) 7146.97,3763.75 C16.2@7149.64,3761.08 ; R1.2@7287.39,2973.73 7290.03,2976.37 v1(7326.76,2976.37) 7363.49,2976.37 R2.2@7366.14,2973.68
  Top Layer w19.68: C30.2@4858.32,2956.68 v1(4905.51,2956.68) ; C23.2@5476.37,2821.54 5479.02,2818.89 v1(5505.9,2818.89) 5532.78,2818.89 C24.2@5535.44,2821.5 5557.76,2799.21 v1(5574.8,2799.21) U8.2@5637.77,2799.24 U8.2@5866.11,2799.24 ; U2.8@5984.44,4622.74 5984.44,4665.55 6007.86,4688.97 v1(6027.55,4688.97) 6064.27,4688.97 C4.2@6066.94,4686.35 v1(6066.92,4728.34) C5.2@6066.94,4770.36 ; v1(6598.42,2661.42) C18.1@6696.84,2661.42 ; U1.8@7008.02,4574.84 v1(7008.03,4645.9) 7048.49,4686.37 C2.2@7090.46,4686.38 v1(7090.5,4718.54) C1.2@7090.46,4750.7
  other v1: 7149.6,3330.7 7188.97,3330.7 7228.34,3330.7 7188.97,3468.5 7228.34,3468.5
5V: C17.1 C21.2 C22.2 C33.2 CN4.2 F1.2 R25.1 R26.1 U8.3 U10.3 U10.4 U10.42 | length 875.6
  Top Layer w5.91: R25.1@4866.14,2644.4 v1(4905.51,2644.37)
  Top Layer w11.81: C33.2@4866.14,2841.2 4905.51,2801.85 v1(4905.51,2799.21) 4915.35,2789.37 U10.42@4954.72,2789.38 ; R26.1@5043.34,2540.68 5053.15,2550.51 U10.3@5053.14,2612.22 5053.15,2651.57 v1(5062.99,2661.41) 5067.91,2656.49 5072.84,2651.56 U10.4@5072.83,2612.22
  Top Layer w19.68: F1.2@4925.14,2346.44 v1(4925.19,2287.4) v1@4964.54,2287.44 ; v1(4925.19,2287.4) v1(4964.56,2287.4) ; C21.2@5476.37,2723.11 5479.01,2720.47 v1(5505.9,2720.47) v1(5574.8,2720.47) 5625.98,2720.47 U8.3@5637.77,2708.69
  Top Layer w39.37: CN4.2@6331.84,2444.86 6331.84,2532.66 6381.84,2582.66 C17.1@6381.84,2661.46
BOOT_SEL_1V8: CN3.240 U7.9 | length 290.4
  Top Layer w5.91: CN3.240@7026.54,3395.64 7026.54,3443.94 7066.94,3484.24 U7.9@7066.92,3669.24
BOOT_SEL_3V3: J2.4 R1.1 SW2.4 U7.12 | length 1781.4
  Top Layer w5.91: U7.12@7066.92,3740.11 7066.94,3779.54 7090.54,3803.14 7326.74,3803.14 7543.34,3586.64 7543.34,3375.54 J2.4@7749.24,3169.64 ; SW2.4@7276.76,2854.68 7287.39,2865.3 v1(7287.39,2897.63) R1.1@7287.39,2939.65
  Bottom Layer w5.91: v1(7287.39,2897.63) 7477.16,2897.64 J2.4@7749.2,3169.68
C29_2: C29.2 U9.6 | length 179.5
  Top Layer w5.91: U9.6@5869.8,2491.16 5902.54,2491.16 5929.14,2464.56 5929.14,2405.46 5948.84,2385.86 C29.2@5971.14,2385.86
C34_2: C34.2 U10.6 | length 91.8
  Top Layer w5.91: U10.6@5112.2,2612.22 5112.2,2531.43 C34.2@5120.04,2523.64
DEBUG_CLK_1V8: CN3.210 U6.9 | length 297.7
  Top Layer w5.91: U6.9@6673.22,3669.28 6673.22,3551.18 6731.29,3493.11 CN3.210@6731.29,3395.67
DEBUG_CLK_3V3: J2.8 U6.12 | length 1349
  Top Layer w5.91: U6.12@6673.22,3740.11 6673.24,3799.24 6716.54,3842.54 v1(6755.89,3842.51)
  Bottom Layer w5.91: v1(6755.89,3842.51) 6933.04,3665.36 7453.52,3665.36 J2.8@7749.24,3369.64
F1_1: C6.2 F1.1 USB1.A4 USB1.A9 USB1.B4 USB1.B9 | length 1164.3
  Top Layer w11.81: USB1.A4@4470.47,2480.91 4472.44,2482.88 v1(4472.44,2543.3) 4482.28,2533.46 USB1.B9@4482.28,2480.91 ; USB1.B4@4659.44,2480.9 4659.44,2536.1 4688.97,2565.63 4671.26,2547.92 USB1.A9@4671.26,2480.9
  Top Layer w19.68: C6.2@4688.97,2565.63 4883.18,2565.63 v1(4885.82,2562.99) v1(4925.19,2523.62) F1.1@4925.19,2425.2
  Mid-Layer 3 w19.68: v1(4472.44,2543.3) 4511.81,2582.68 4866.14,2582.68 v1(4925.19,2523.62)
FLASH_WRITEPROTECT: R2.1 SW2.3 U1.3 | length 3865.3
  Top Layer w5.91: U1.3@6908.04,4881.86 6908.74,4980.26 7012.64,5082.66 7622.14,5082.66 7661.44,5043.36 7877.94,5043.36 7937.04,4984.26 7937.04,3035.46 7838.54,2937.06 7405.54,2937.06 7376.74,2908.24 SW2.3@7376.74,2854.64 ; R2.1@7366.14,2939.6 7368.78,2937 v1(7405.5,2937)
GND: C1.1 C2.1 C3.1 C4.1 C5.1 C6.1 C7.1 C8.1 C9.1 C10.1 C11.1 C12.1 C13.1 C14.1 C15.1 C16.1 C17.2 C18.2 C19.1 C20.1 C21.1 C22.1 C23.1 C24.1 C25.1 C26.1 C27.1 C28.1 C29.1 C30.1 C31.1 C32.1 C33.1 C34.1 CN1.1 CN1.5 CN1.6 CN2.1 CN2.5 CN2.6 CN3.1 CN3.2 CN3.3 CN3.4 CN3.7 CN3.8 CN3.10 CN3.13 CN3.14 CN3.19 CN3.20 CN3.25 CN3.26 CN3.31 CN3.32 CN3.37 CN3.38 CN3.40 CN3.43 CN3.44 CN3.46 CN3.49 CN3.50 CN3.55 CN3.56 CN3.58 CN3.61 CN3.62 CN3.64 CN3.67 CN3.68 CN3.73 CN3.74 CN3.79 CN3.80 CN3.85 CN3.86 CN3.102 CN3.107 CN3.113 CN3.119 CN3.125 CN3.129 CN3.132 CN3.135 CN3.138 CN3.141 CN3.144 CN3.146 CN3.147 CN3.152 CN3.153 CN3.158 CN3.159 CN3.164 CN3.165 CN3.170 CN3.171 CN3.176 CN3.177 CN3.200 CN3.201 CN3.217 CN3.231 CN3.241 CN3.242 CN3.243 CN3.244 CN3.245 CN3.246 CN3.247 CN3.248 CN3.249 CN3.250 CN3.261 CN3.262 CN4.1 J1.1 J2.1 J2.32 J2.40 pad.1@4334.64,2759.84 pad.1@4334.64,5279.52 pad.2 Q1.2 R4.1 R5.2 R11.2 R17.1 R21.1 SW2.1 SW2.2 U1.4 U2.4 U3.15 U4.15 U5.11 U6.15 U7.15 U8.1 U9.4 U9.9 U10.9 U10.18 U10.25 U10.34 U10.45 U10.47 USB1.1 USB1.2 USB1.3 USB1.4 USB1.A1 USB1.A12 USB1.B1 USB1.B12 X1.2
  other v1: 5200.78,2366.14 5200.78,2444.88 4413.38,2523.62 4413.38,2602.36 4767.71,2622.04 4649.6,2759.84 4836.61,2759.84 5358.26,2759.84 6224.4,2759.84 6381.88,2759.84 6539.36,2759.84 6775.58,2759.84 6933.06,2818.89 6598.42,2858.26 5023.62,2877.95 6775.58,2917.32 6933.06,2917.32 5555.11,2956.69 5771.65,2976.37 5830.7,2976.37 5023.62,2996.06 6224.4,2996.06 6303.14,2996.06 6992.12,3015.74 7031.49,3015.74 7070.85,3015.74 7562.98,3074.8 4748.03,3153.54 5200.78,3153.54 5653.54,3153.54 6066.92,3153.54 6381.88,3153.54 6775.58,3153.54 7090.54,3153.54 7129.91,3153.54 7562.98,3153.54 6775.58,3311.02 7031.49,3311.02 7070.85,3311.02 4708.66,3330.7 5003.93,3330.7 5397.63,3330.7 5594.48,3330.7 6066.92,3350.39 7070.85,3448.81 6814.95,3665.35 5043.3,3704.72 5515.74,3704.72 6618.1,3704.72 7011.8,3704.72 6460.62,3783.46 7149.56,4689.01 6775.54,4728.38 7149.56,4787.43 5751.96,4807.08 6145.66,4807.08 5751.96,4885.82 6775.54,4885.86 6303.14,5161.41 6775.58,5161.41
GPIO_PA0_1V8: CN3.87 U6.1 | length 1849.1
  Top Layer w5.91: v1(5397.63,3183.07) 5441.91,3138.79 CN3.87@5441.91,3072.83 ; v1(6480.31,3566.92) 6547.23,3633.84 U6.1@6547.24,3671.21
  Bottom Layer w5.91: v1@5397.64,3183.04 6549.24,3183.04 6578.74,3212.64 6578.74,3271.64 6568.84,3281.54 6568.84,3478.34 v1(6480.31,3566.92)
GPIO_PA0_3V3: J2.20 U6.20 | length 1427.8
  Top Layer w5.91: v1(6539.36,3901.57) 6547.23,3893.7 U6.20@6547.23,3740.15
  Mid-Layer 1 w5.91: v1(6539.36,3901.57) 6637.78,3999.99 7641.72,3999.99 7672.04,3969.67 J2.20@7749.2,3969.67
GPIO_PA1_1V8: CN3.118 U6.2 | length 986.3
  Top Layer w5.91: CN3.118@5747.04,3395.64 5747.04,3443.94 5810.94,3507.84 6450.74,3507.84 6562.94,3620.04 U6.2@6562.94,3669.24
GPIO_PA1_3V3: J2.18 R8.2 U6.19 | length 3071.2
  Top Layer w5.91: U6.19@6562.94,3740.14 6562.94,3885.78 v1(6578.73,3901.57) 6618.1,3940.94 7612.24,3940.94 7683.44,3869.64 J2.18@7749.24,3869.64 ; v1(6677.16,2405.51) R8.2@6778.2,2405.54
  Mid-Layer 1 w5.91: v1@6578.74,3901.54 6519.64,3842.54 6519.64,3448.84 6677.14,3291.34 v1@6677.14,2405.54
GPIO_PA2_1V8: CN3.124 U6.3 | length 962.6
  Top Layer w5.91: CN3.124@5806.14,3395.64 5806.14,3463.64 5830.64,3488.14 6460.54,3488.14 6578.74,3606.34 U6.3@6578.74,3669.24
GPIO_PA2_3V3: J2.16 R10.2 U6.18 | length 3140.9
  Top Layer w5.91: U6.18@6578.73,3740.15 6578.73,3862.2 v1(6618.1,3901.57) ; v1(6706.68,2346.45) R10.2@6778.2,2346.44
  Mid-Layer 1 w5.91: v1@6706.64,2346.44 6706.64,3301.14 6549.24,3458.64 6549.24,3832.64 6618.14,3901.54 6687.07,3970.47 7548.41,3970.47 J2.16@7749.24,3769.64
GPIO_PA3_1V8: CN3.126 U6.4 | length 955.3
  Top Layer w5.91: CN3.126@5825.74,3395.64 5825.74,3443.94 5850.34,3468.54 6470.54,3468.54 6594.44,3592.44 U6.4@6594.44,3669.24
GPIO_PA3_3V3: J2.14 R6.2 U6.17 | length 2984.8
  Top Layer w5.91: U6.17@6594.47,3740.15 6594.47,3838.57 v1(6657.47,3901.57) ; v1(6736.21,2464.56) R6.2@6778.22,2464.56
  Mid-Layer 1 w5.91: v1(6736.21,2464.56) 6736.21,3311.02 6578.73,3468.5 6578.73,3822.83 v1(6657.47,3901.57) 6696.84,3940.94 7477.94,3940.94 J2.14@7749.24,3669.64
I2C0_SCL_1V8: CN3.185 U5.6 | length 672.5
  Top Layer w5.91: U5.6@6256.89,3650.74 6256.89,3554.12 v1(6263.77,3547.24) ; v1(6421.25,3212.59) 6485.22,3148.62 CN3.185@6485.22,3072.83
  Bottom Layer w5.91: v1(6263.77,3547.24) 6421.25,3389.76 v1(6421.25,3212.59)
I2C0_SCL_3V3: CN1.4 J2.23 U5.15 | length 3159.7
  Top Layer w5.91: U5.15@6256.89,3876.8 6253.93,3879.76 v1(6253.93,4029.52) 6273.62,4049.21 7572.82,4049.21 7641.72,4118.1 7797.63,4118.1 J2.23@7849.2,4169.67 ; v1(6598.42,5082.67) 6637.77,5122.02 CN1.4@6637.77,5222.92
  Bottom Layer w5.91: v1(6253.93,4029.52) 6253.93,4738.19 v1(6598.42,5082.67)
I2C0_SDA_1V8: CN3.187 U5.7 | length 670
  Top Layer w5.91: U5.7@6282.48,3650.74 6282.48,3567.9 v1(6303.14,3547.24) ; v1(6460.62,3212.59) 6504.9,3168.31 CN3.187@6504.9,3072.83
  Bottom Layer w5.91: v1(6303.14,3547.24) 6460.62,3389.76 v1(6460.62,3212.59)
I2C0_SDA_3V3: CN1.3 J2.21 U5.14 | length 3082.1
  Top Layer w5.91: U5.14@6282.48,3876.8 6282.48,4018.7 v1(6293.3,4029.52) ; v1(6598.42,5023.61) 6677.14,5102.34 CN1.3@6677.14,5222.92
  Mid-Layer 1 w5.91: v1(6293.3,4029.52) 7809.05,4029.52 J2.21@7849.2,4069.67
  Bottom Layer w5.91: v1(6293.3,4029.52) 6293.3,4718.5 v1(6598.42,5023.61)
I2C1_SCL_1V8: CN3.189 U5.8 | length 667.6
  Top Layer w5.91: U5.8@6308.07,3650.74 6308.07,3581.68 v1(6342.51,3547.24) ; v1(6499.99,3212.59) 6524.59,3187.99 CN3.189@6524.59,3072.83
  Bottom Layer w5.91: v1(6342.51,3547.24) 6499.99,3389.76 v1(6499.99,3212.59)